# EAGLE board greenhousectrl-latest-saturday (EAGLE 7.7.0)
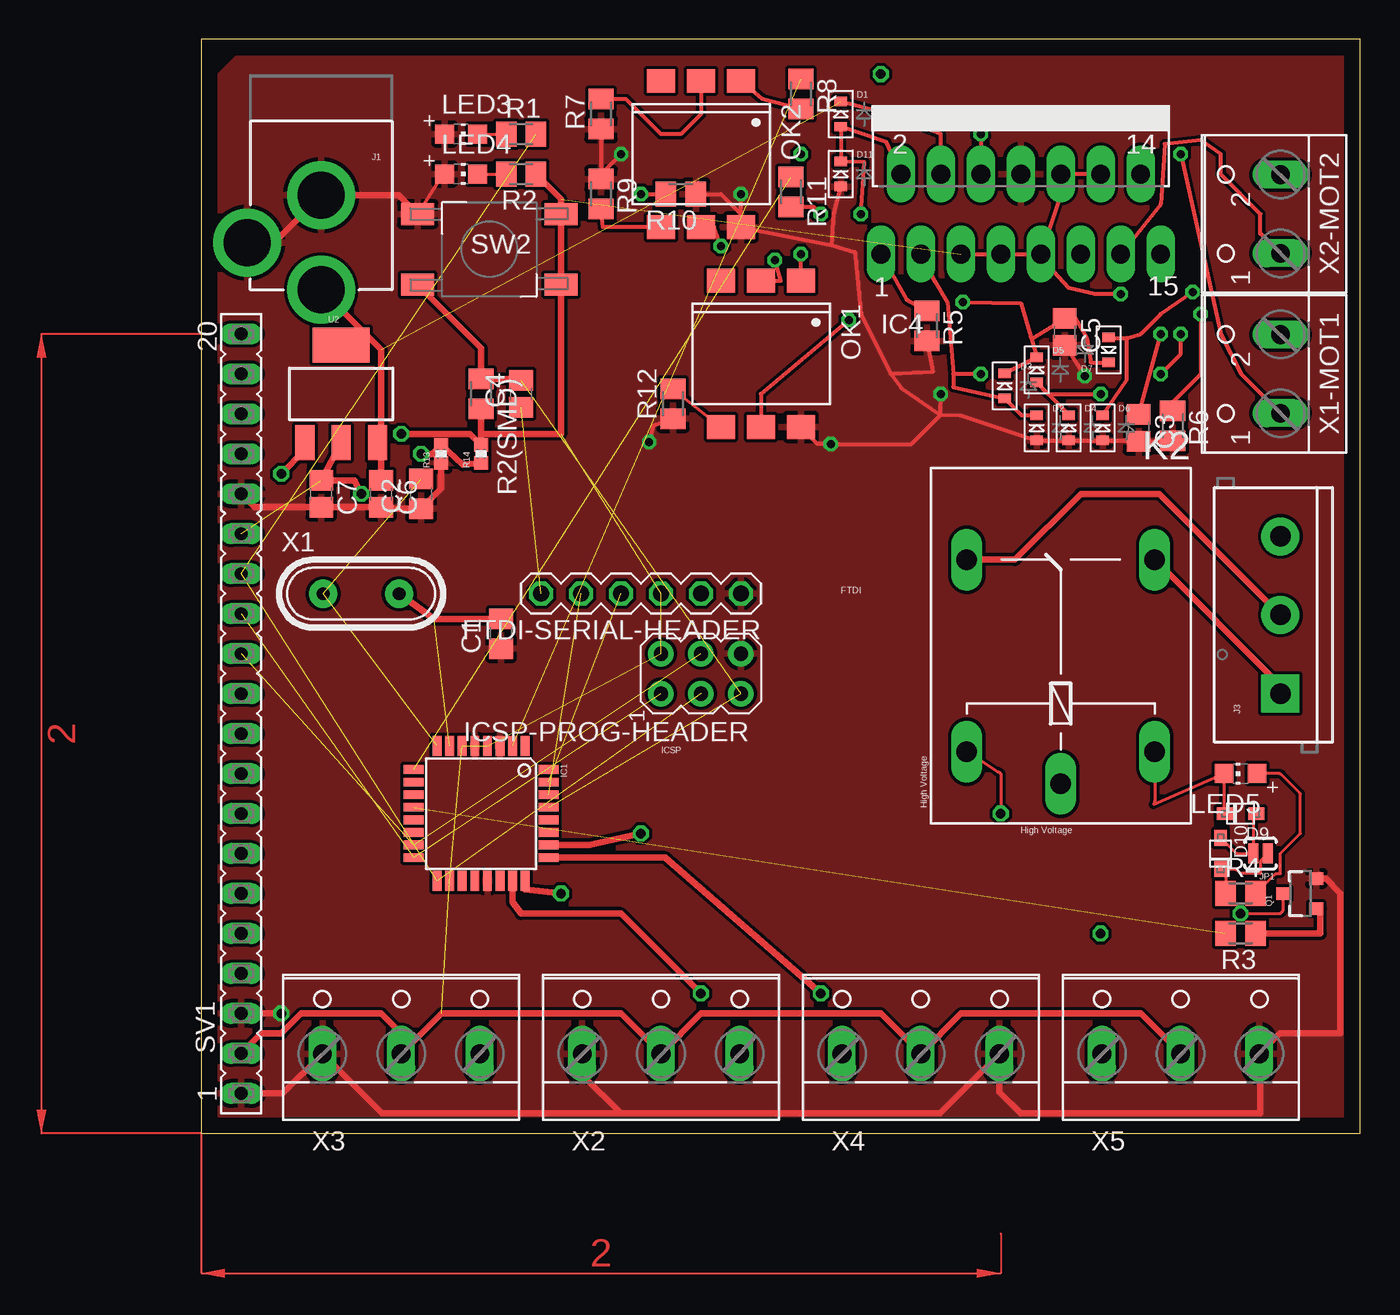
[diagram p0: board, top side]
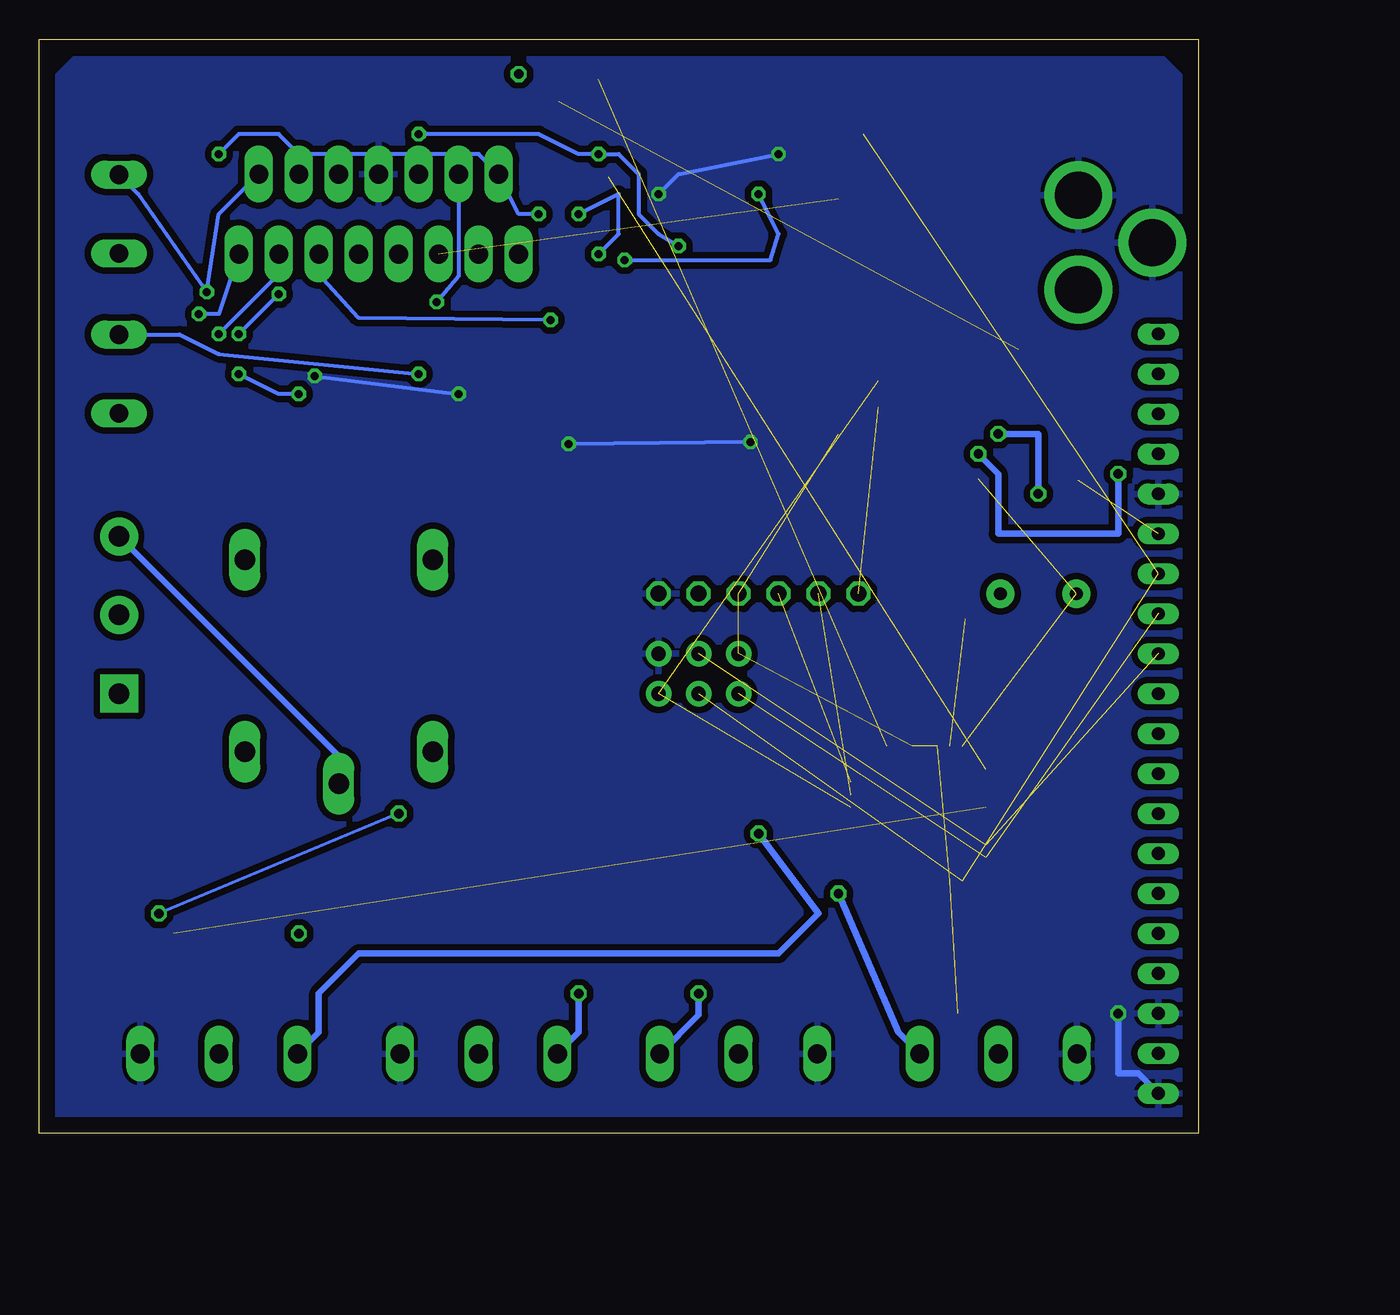
[diagram p1: board, bottom side, seen from below]

Size 73.64 x 69.52 mm. Coordinates in mm from the lower left corner, seen from the top.
Outline: 0,0 73.64,0 73.64,69.52 0,69.52 0,0
Copper layers (1*16): Top 0.035mm / dielectric 1.5mm / Bottom 0.035mm
Design rules "default": minimum track width 10mil, minimum drill 24mil, track to track 8mil, track to pad 8mil, pad to pad 8mil, via to via 8mil, smd to smd 8mil, copper to edge 40mil, drill to drill 8mil, minimum pad ring 10mil, minimum via ring 8mil, stop-mask expansion 4mil, vias tented up to drill 0mil, thermal gap 10mil

## Footprints (pad centres in the part's own frame; a part is rotated, then mirrored left to right if it is on the bottom)
C0805 = smd 1.3 x 1.5: 1 -0.95,0; 2 0.95,0
C0805' = smd 1.3 x 1.5: 1 -0.85,0; 2 0.85,0
SOD-523 = smd 0.8 x 0.6: A 0,-0.8; K 0,0.8
SOD-323F = smd 1 x 0.8: A -1,0; C 1,0
06X1-PTH = drill 1.016 octagon: 1 -6.35,0; 2 -3.81,0; 3 -1.27,0; 4 1.27,0; 5 3.81,0; 6 6.35,0
TQFP32-08 = smd 1.27 x 0.559: 1 -4.293,2.8; 2 -4.293,2; 3 -4.293,1.2; 4 -4.293,0.4; 5 -4.293,-0.4; 6 -4.293,-1.2; 7 -4.293,-2; 8 -4.293,-2.8; 17 4.293,-2.8; 18 4.293,-2; 19 4.293,-1.2; 20 4.293,-0.4; 21 4.293,0.4; 22 4.293,1.2; 23 4.293,2; 24 4.293,2.8 | smd 0.559 x 1.27: 9 -2.8,-4.293; 10 -2,-4.293; 11 -1.2,-4.293; 12 -0.4,-4.293; 13 0.4,-4.293; 14 1.2,-4.293; 15 2,-4.293; 16 2.8,-4.293; 25 2.8,4.293; 26 2,4.293; 27 1.2,4.293; 28 0.4,4.293; 29 -0.4,4.293; 30 -1.2,4.293; 31 -2,4.293; 32 -2.8,4.293
MULTIWATT-15 = drill 1.2 long: 1 -8.89,-7.62; 2 -7.62,-2.54; 3 -6.35,-7.62; 4 -5.08,-2.54; 5 -3.81,-7.62; 6 -2.54,-2.54; 7 -1.27,-7.62; 8 0,-2.54; 9 1.27,-7.62; 10 2.54,-2.54; 11 3.81,-7.62; 12 5.08,-2.54; 13 6.35,-7.62; 14 7.62,-2.54; 15 8.89,-7.62
AVRISP = drill 0.9 pad 1.626: 1 -1.27,2.54; 2 1.27,2.54; 3 -1.27,0; 4 1.27,0; 5 -1.27,-2.54; 6 1.27,-2.54
POWER_JACK_PTH = drill 2.997 pad 4.318: GND 0,7.7; GNDBREAK 4.7,10.7; PWR 0,13.7
SCREWTERMINAL-5MM-3 = drill 1.3 pad 2.413 square: 1 0,0 | drill 1.3 pad 2.413: 2 5,0; 3 10,0
PAD-JUMPER-2-NO_YES_SILK = smd 0.635 x 1.27: 1 -0.45,0; 2 0.45,0
G5LE = drill 1.321 long: 1 -7.493,-5.969; 2 -7.493,5.969; O 4.699,5.969; P -9.525,0; S 4.699,-5.969
CHIP-LED0805 = smd 1.2 x 1.2: A 0,-1.05; C 0,1.05
DIL6-SMD = smd 1.78 x 1.52: 1 -2.54,-4.645; 2 0,-4.645; 3 2.54,-4.645; 4 2.54,4.645; 5 0,4.645; 6 -2.54,4.645
SOT23-3 = smd 0.8 x 0.9: 1 -0.95,-1; 2 0.95,-1; 3 0,1.1
M0805 = smd 1.3 x 1.6: 1 -0.95,0; 2 0.95,0
0402-RES = smd 0.85 x 0.9: 1 -0.58,0; 2 0.58,0
FE20 = drill 0.813 long: 1 -24.13,0; 2 -21.59,0; 3 -19.05,0; 4 -16.51,0; 5 -13.97,0; 6 -11.43,0; 7 -8.89,0; 8 -6.35,0; 9 -3.81,0; 10 -1.27,0; 11 1.27,0; 12 3.81,0; 13 6.35,0; 14 8.89,0; 15 11.43,0; 16 13.97,0; 17 16.51,0; 18 19.05,0; 19 21.59,0; 20 24.13,0
SPST_NO_SMD = smd 2.108 x 1.397: 1 0,4.496; 2 9.119,4.496; 3 0,0; 4 9.119,0
SOT223 = smd 1.219 x 2.235: 1 -2.311,-3.099; 2 0,-3.099; 3 2.311,-3.099 | smd 3.6 x 2.2: 4 0,3.099
HC49 = drill 0.813 pad 1.8: 1 -2.413,0; 2 2.413,0
W237-102 = drill 1.194 long: 1 -2.5,-1.27; 2 2.5,-1.27
W237-103 = drill 1.194 long: 1 -5,-1.29; 2 0,-1.29; 3 5,-1.29

## Placement (x,y rotation side)
C1  [C0805]  19.05,31.75 90 top
C2  [C0805]  13.97,40.64 90 top
C3  1.0uF  [C0805']  59.56,44.83 270 top
C4  0.1uF  [C0805']  20.32,46.99 90 top
C5  1.0uF  [C0805']  54.86,50.93 270 top
C6  0.1uF  [C0805']  11.43,40.64 270 top
C7  0.1uF  [C0805']  7.62,40.64 270 top
D1  [SOD-523]  40.64,64.77 0 top
D2  [SOD-523]  53.09,44.83 0 top
D3  [SOD-523]  51.05,47.5 0 top
D4  [SOD-523]  55.12,44.83 0 top
D5  [SOD-523]  53.09,48.51 0 top
D6  [SOD-523]  57.28,44.83 0 top
D7  [SOD-523]  57.66,49.78 180 top
D9  1N4148  [SOD-323F]  66.04,20.32 180 top
D10  Zener  [SOD-323F]  64.77,17.78 270 top
D11  [SOD-523]  40.64,60.96 0 top
FTDI-SERIAL-HEADER  HEADER-06X1-MALE  [06X1-PTH]  27.94,34.29 180 top
IC1  ATMEGA168TQFP-08  [TQFP32-08]  17.78,20.32 270 top
IC4  L298  [MULTIWATT-15]  52.07,63.5 0 top
ICSP-PROG-HEADER  AVRISP-6  [AVRISP]  31.75,29.21 90 top
J1  POWER_JACKPTH  [POWER_JACK_PTH]  7.62,67.31 180 top
J3  [SCREWTERMINAL-5MM-3]  68.58,27.94 90 top
JP1  JUMPER-PAD-2-NOYES_SILK  [PAD-JUMPER-2-NO_YES_SILK]  67.31,17.78 180 top
K2  G5LE  [G5LE]  54.61,31.75 90 top
LED3  [CHIP-LED0805]  16.51,63.5 270 top
LED4  [CHIP-LED0805]  16.51,60.96 270 top
LED5  [CHIP-LED0805]  66.04,22.86 90 top
OK1  4N27SM  [DIL6-SMD]  35.56,49.53 180 top
OK2  4N27SM  [DIL6-SMD]  31.75,62.23 180 top
Q1  MMBT2222A  [SOT23-3]  69.85,15.24 90 top
R1  [M0805]  20.32,63.5 0 top
R2  [M0805]  20.32,60.96 180 top
R2(SMD)  [M0805]  17.78,46.99 270 top
R3  1K  [M0805]  66.04,12.7 180 top
R4  1K  [M0805]  66.04,15.24 0 top
R5  [M0805]  46.1,51.31 270 top
R6  [M0805]  61.72,44.96 270 top
R7  [M0805]  25.4,64.77 90 top
R8  [M0805]  38.1,66.04 270 top
R9  [M0805]  25.4,59.69 270 top
R10  [M0805]  30.48,59.69 180 top
R11  [M0805]  37.47,59.82 270 top
R12  [M0805]  29.97,46.35 90 top
R13  [0402-RES]  15.24,43.18 90 top
R14  [0402-RES]  17.78,43.18 90 top
SV1  [FE20]  2.54,26.67 90 top
SW2  MOMENTARYBUTTON  [SPST_NO_SMD]  22.86,58.42 180 top
U2  V_REG_317SMD  [SOT223]  8.89,46.99 0 top
X1  CRYSTALS-NOGND-HC49  [HC49]  10.16,34.29 0 top
X1-MOT1  [W237-102]  67.31,48.26 90 top
X2  [W237-103]  29.21,6.35 0 top
X2-MOT2  [W237-102]  67.31,58.42 90 top
X3  [W237-103]  12.7,6.35 0 top
X4  [W237-103]  45.72,6.35 0 top
X5  [W237-103]  62.23,6.35 0 top

## Library data of the parts
C1 C2 = resistor
C3-C7 D1-D7 D10 D11 ICSP-PROG-HEADER LED3-LED5 R1 R2 R2(SMD) R3-R12 = adafruit
D9 = adafruit; PROD_ID: DIO-08378
FTDI-SERIAL-HEADER = GeekAmmo; OTHER: 4UCON 00834; URL: http://www.4uconnector.com/online/SearchPro.asp?FormName=ProSearch&FormAction=search&s_GroupNo=&s_keyword=00834
IC1 = atmega328p
IC4 = st-microelectronics; MPN: L298N; OC_FARNELL: 1589425; OC_NEWARK: 32M1527
J1 = SparkFun-Connectors; PROD_ID: CONN-08197
J3 = SparkFun-Connectors; PROD_ID: CONN-10134; STOREFRONT_ID: PRT-08433
JP1 = SparkFun-Passives
K2 = relay; OC_FARNELL: unknown; OC_NEWARK: unknown
OK1 OK2 = optocoupler; MF: FAIRCHILD SEMICONDUCTOR; MPN: 4N27S-M; OC_FARNELL: unknown; OC_NEWARK: 05C3300
Q1 = SparkFun-DiscreteSemi; PROD_ID: TRANS-08049
R13 R14 = SparkFun-Resistors
SV1 = con-lsta; OC_FARNELL: unknown; OC_NEWARK: unknown
SW2 = ece388
U2 = SparkFun-PowerIC
X1 = IQD-Frequency-Products
X1-MOT1 X2-MOT2 = con-wago-500; MPN: 237-102; OC_FARNELL: unknown; OC_NEWARK: 70K9898
X2-X5 = ece388; MPN: 237-103; OC_FARNELL: unknown; OC_NEWARK: 18M7116

## Nets
+5V: C3.1 C7.1 FTDI-SERIAL-HEADER.3 IC1.4 IC1.6 IC1.18 IC4.5 IC4.7 IC4.9 IC4.10 IC4.12 ICSP-PROG-HEADER.2 R2(SMD).2 R2.1 R14.2 SV1.2 SV1.15 U2.2 X2.2 X3.2 X4.2 X5.2
+12V: C5.1 C6.1 D1.K D3.K D5.K D7.K IC4.4 J1.PWR U2.3
ADC4: SV1.4
ADC5: SV1.5
COIL: D10.C JP1.1 K2.2 Q1.3 R4.1
COMMON: J3.3 K2.P
CTS(DOESNTEXIST): FTDI-SERIAL-HEADER.2
DIODENODE: D9.A D10.A JP1.2
DTR: C4.1 FTDI-SERIAL-HEADER.6
ENA: IC4.6 OK2.5
ENB: IC4.11 OK1.5
GND: C1.1 C2.1 C3.2 C5.2 C6.2 C7.2 D2.A D4.A D6.A D11.A FTDI-SERIAL-HEADER.1 IC1.3 IC1.5 IC1.21 IC4.8 ICSP-PROG-HEADER.6 J1.GND J1.GNDBREAK LED3.A LED4.A OK1.6 OK2.6 Q1.2 R5.2 R6.2 R7.1 R9.1 R10.1 R12.1 R13.1 SV1.1 SV1.3 SV1.16 SW2.4 X2.1 X3.1 X4.3 X5.3
MISO: IC1.16 ICSP-PROG-HEADER.1 SV1.13
MOSI: IC1.15 ICSP-PROG-HEADER.4 SV1.12
N$1: OK2.1 R8.2
N$2: LED4.C R2.2
N$3: LED5.A R4.2
N$4: OK2.2 R7.2
N$5: OK2.4 R9.2
N$6: Q1.1 R3.1
N$7: R13.2 R14.1 U2.1
N$8: OK1.1 R11.2
N$9: OK1.2 R10.2
N$10: LED3.C R1.1
N$11: C1.2 IC1.7 X1.2
N$13: C2.2 IC1.8 X1.1
N$15: OK1.4 R12.2
NC: J3.1 K2.S
NO: J3.2 K2.O
OUT1: D1.A D11.K IC4.2 X1-MOT1.1
OUT2: D2.K D3.A IC4.3 X1-MOT1.2
OUT3: D4.K D5.A IC4.13 X2-MOT2.1
OUT4: D6.K D7.A IC4.14 X2-MOT2.2
PB0: IC1.12 R3.2
PB1: IC1.13
PB2: IC1.14
PC0: IC1.23 X2.3
PC1: IC1.24 X3.3
PC2: IC1.25 X4.1
PC3: IC1.26 X5.1
PC4: IC1.27
PC5: IC1.28
PD2: IC1.32
PD3: IC1.1
PD4: IC1.2 R8.1
PD5: IC1.9 R11.1
PD6: IC1.10
PD7: IC1.11
RST: C4.2 IC1.29 ICSP-PROG-HEADER.5 R2(SMD).1 SW2.2
RX: FTDI-SERIAL-HEADER.5 IC1.30
SCK: IC1.17 ICSP-PROG-HEADER.3 R1.2 SV1.14
SEN_A: IC4.1 R5.1
SEN_B: IC4.15 R6.1
SS: SV1.11
TX: FTDI-SERIAL-HEADER.4 IC1.31
VCC: D9.C K2.1 LED5.C

## Tracks (layer width: path | path; a pad name or v marks a point on that pad's centre or on a via)
+5V  (via drill 0.51, 0.6)  (8 unrouted)
  Top 0.254: C3.1 v60.96,50.8 | v58.42,53.34 56.77,53.34 55.12,53.72 53.85,55.12 IC4.9 | IC4.9 54.61,59.69 IC4.10 IC4.12 | IC4.9 IC4.7 IC4.5
  Top 0.406: SV1.2 3.81,6.35 5.08,6.35 6.35,7.62 11.43,7.62 12.7,6.35 X3.2 15.26,7.62 26.67,7.62 29.21,5.08 X2.2 31.77,7.62 43.18,7.62 45.72,5.08 X4.2 48.28,7.62 59.69,7.62 62.23,5.08 X5.2 | U2.2 C7.1 9.74,41.49 v10.16,40.64 | R2(SMD).2 17.78,44.45 | 17.78,44.45 R14.2 17.09,44.45 v12.7,44.45 | R2.1 22.86,59.37 22.86,44.45 17.78,44.45
  Bottom 0.254: v60.96,50.8 v58.42,53.34
  Bottom 0.406: v12.7,44.45 10.16,44.45 v10.16,40.64
+12V  (via drill 0.51)  (1 unrouted)
  Top 0.254: IC4.4 46.99,63.5 43.65,64.77 D1.K | v48.39,52.83 52.07,52.74 52.7,50.61 | 52.7,50.61 D5.K D3.K | D7.K 56.52,48.98 56.26,50.55 55.54,51.82 C5.1 52.81,50.51 52.7,50.61
  Top 0.406: U2.3 11.43,43.66 | 11.43,43.66 11.43,43.18 C6.1 | J1.PWR 11.43,49.8 11.43,43.66
  Bottom 0.254: IC4.4 46.99,54.48 v48.39,52.83
COIL  (via drill 0.6)
  Top 0.203: K2.2 50.57,22.99 arc-45 50.75,22.91 50.8,22.86 v50.8,20.32 | v66.04,13.97 66.04,14.19 | 66.04,14.19 arc45 65.97,14.36 R4.1 65.09,16.36 arc45 65.02,16.53 D10.C 65.67,16.78 arc-45 65.84,16.71 66.04,16.51 67.31,16.51 67.31,17.23 arc-45 67.38,17.4 JP1.1 | 66.04,14.19 66.18,14.04 arc45 66.36,13.97 68.58,13.97 68.68,14.07 arc45 68.75,14.24 Q1.3
  Bottom 0.203: v50.8,20.32 v66.04,13.97
COMMON
  Bottom 0.406: J3.3 54.61,23.97 K2.P
DIODENODE
  Top 0.203: D9.A 66.93,20.21 arc45 66.86,20.04 JP1.2 65.88,17.78 arc-45 65.7,17.85 D10.A
DTR  (1 unrouted)
ENA  (via drill 0.51)
  Top 0.254: v49.53,63.5 IC4.6 | v33.02,56.39 32.59,57.59 OK2.5
  Bottom 0.254: v49.53,63.5 41.91,63.5 39.37,62.23 v38.1,62.23 36.83,62.23 35.56,60.96 35.56,58.42 34.29,57.15 v33.02,56.39
ENB  (via drill 0.51)
  Top 0.254: v41.15,51.69 35.56,46.99 OK1.5
  Bottom 0.254: v41.15,51.69 53.34,51.82 55.88,54.61 IC4.11
GND  (via drill 0.51, 0.6)
  Top 0.203: LED4.A 15.09,60.59 arc45 15.01,60.41 SW2.4
  Top 0.254: R7.1 25.4,60.96 | 25.4,60.96 R9.1 | 43.81,48.25 41.91,52.07 41.53,56.01 40.08,56.44 | 43.81,48.25 44.49,47.37 46.93,45.68 | 46.93,45.68 46.99,45.67 | 46.99,45.67 48.23,45.63 D2.A D4.A D6.A 59.51,44.03 C3.2 61.7,43.98 R6.2 | 40.08,56.44 OK2.6 34.29,58.42 | 40.08,56.44 40.2,58.45 D11.A | 34.29,58.42 v34.29,59.69 | v26.67,62.23 25.4,60.96 | C5.2 55.24,49.53 v56.13,48.13 | R5.2 46.48,48.38 43.81,48.25 | v46.99,46.99 46.97,46.99 46.93,45.68 | R12.1 28.7,44.96 v28.45,43.94 | OK1.6 39.17,43.81 v40.01,43.81 45.13,43.81 46.99,45.67 | R10.1 33.02,59.69 34.29,58.42
  Top 0.406: 71.09,16.43 Q1.2 71.44,16.19 72.39,15.24 72.39,6.35 68.52,6.35 X5.3 67.31,4.98 67.31,1.27 52.07,1.27 50.72,2.62 X4.3 46.93,1.27 26.67,1.27 | 26.67,1.27 24.21,3.73 X2.1 | 26.67,1.27 11.49,1.27 X3.1 5.18,2.54 SV1.1 | v5.08,7.62 SV1.3 | SV1.16 3.39,39.79 C7.2 C6.2 11.53,39.69 C2.1 15.24,40.96 R13.1 | SW2.4 12.55,59.61 J1.GND 4.62,56.61 J1.GNDBREAK
  Bottom 0.254: v34.29,59.69 33.02,60.96 v26.67,62.23 | v56.13,48.13 v46.99,46.99 | v28.45,43.94 v40.01,43.81
  Bottom 0.406: SV1.1 3.81,3.81 5.08,3.81 v5.08,7.62
  pour Bottom (isolate 0.406): 0,0 0,66.04 2.54,68.58 71.12,68.58 73.66,66.04 73.66,0
  pour Top: 0,0 73.66,0 73.66,67.31 72.39,68.58 2.54,68.58 0,66.04
MISO  (2 unrouted)
MOSI  (2 unrouted)
N$1
  Top 0.254: R8.2 35.67,65.72 OK2.1
N$2
  Top 0.203: LED4.C R2.2
N$3
  Top 0.203: R4.2 68.19,16.44 arc-45 68.36,16.51 68.58,16.51 68.58,17.78 69.85,19.05 69.85,21.59 68.65,22.79 arc45 68.47,22.86 LED5.A
N$4
  Top 0.254: OK2.2 31.75,64.77 30.48,63.5 29.21,63.5 26.99,65.72 R7.2
N$5
  Top 0.254: OK2.4 25.52,57.59 R9.2
N$6
  Top 0.406: R3.1 71.12,12.7 71.12,14.29 Q1.1
N$7  (via drill 0.6)
  Top 0.406: R14.1 16.62,42.49 R13.2 14.66,43.18 v13.97,43.18 | v5.08,41.91 6.58,43.41 U2.1
  Bottom 0.406: v13.97,43.18 12.7,41.91 12.7,38.1 5.08,38.1 v5.08,41.91
N$8  (via drill 0.51)
  Top 0.254: OK1.1 v38.1,55.88 | v39.37,58.42 38.92,58.87 R11.2
  Bottom 0.254: v38.1,55.88 36.83,57.15 36.83,59.69 v39.37,58.42
N$9  (via drill 0.51)
  Top 0.203: R10.2 29.28,59.44 arc45 29.21,59.27
  Top 0.254: OK1.2 36.83,54.17 v36.45,55.5 | v27.94,59.69 R10.2
  Bottom 0.254: v36.45,55.5 27.18,55.5 26.67,57.15 v27.94,59.69
N$10
  Top 0.203: LED3.C R1.1
N$11  (1 unrouted)
  Top 0.406: X1.2 14.79,32.7 C1.2
N$13  (2 unrouted)
N$14  (via drill 0.6)
  other vias: 57.15,12.7
N$15
  Top 0.203: OK1.4 R12.2
N$16  (via drill 0.6)
  other vias: 43.18,67.31
NC
  Top 0.406: K2.S 68.58,28.45 J3.1
NO
  Top 0.406: J3.2 60.88,40.64 55.88,40.64 51.69,36.45 K2.O
OUT1  (via drill 0.51)
  Top 0.254: IC4.2 43.52,62.99 D1.A D11.K 42.13,61.72 v41.91,58.42 | v62.23,62.23 64.77,50.8 66.08,48.26 X1-MOT1.1
  Bottom 0.254: v41.91,58.42 43.18,58.42 IC4.2 45.72,62.23 57.15,62.23 58.42,63.5 60.96,63.5 v62.23,62.23
OUT2  (via drill 0.51)
  Top 0.254: IC4.3 46.61,54.14 47.41,52.83 47.79,48.26 | D2.K 52.12,45.63 D3.A 47.79,47.42 47.79,48.26 | v49.53,48.26 47.79,48.26
  Bottom 0.254: X1-MOT1.2 64.73,50.76 62.23,49.53 v49.53,48.26
OUT3  (via drill 0.51)
  Top 0.254: D4.K 55.12,45.68 D5.A 53.81,46.99 v57.15,46.99 | X2-MOT2.1 67.35,57.15 67.31,57.15 67.31,58.42 64.77,60.96 64.77,62.23 63.5,63.12 61.21,62.87 60.96,59.05 IC4.13 | v60.96,48.26 62.23,49.53 v62.23,50.8
  Bottom 0.254: v57.15,46.99 58.42,46.99 v60.96,48.26 | v62.23,50.8 58.42,54.61 IC4.13
OUT4  (via drill 0.51)
  Top 0.254: v62.99,53.47 60.96,52.07 59.69,50.8 58.8,50.55 | D6.K 58.8,47.88 58.8,50.55 | D7.A 57.7,50.55 58.8,50.55
  Bottom 0.254: 69.89,61 X2-MOT2.2 67.35,59.69 v62.99,53.47 62.23,58.42 IC4.14
PB0  (1 unrouted)
PC0  (via drill 0.6)
  Top 0.406: v31.75,8.89 26.67,13.97 20.32,13.97 19.78,14.7 IC1.23
  Bottom 0.406: X2.3 31.75,7.52 v31.75,8.89
PC1  (via drill 0.6)
  Top 0.406: v22.86,15.24 20.58,15.5 IC1.24
  Bottom 0.406: X3.3 19.05,6.41 v22.86,15.24
PC2  (via drill 0.6)
  Top 0.406: v39.37,8.89 29.47,17.52 IC1.25
  Bottom 0.406: X4.1 39.37,6.41 v39.37,8.89
PC3  (via drill 0.6)
  Top 0.406: v27.94,19.05 24.67,18.32 IC1.26
  Bottom 0.406: X5.1 55.88,6.41 55.88,8.89 53.34,11.43 26.67,11.43 24.13,13.97 v27.94,19.05
PD4  (1 unrouted)
PD5  (1 unrouted)
RST  (2 unrouted)
  Top 0.406: C4.2 20.22,47.94 R2(SMD).1 17.78,49.89 SW2.2
RX  (1 unrouted)
SCK  (3 unrouted)
SEN_A
  Top 0.254: R5.1 44.83,52.96 IC4.1
SEN_B  (via drill 0.51)
  Top 0.254: v63.5,52.07 63.5,48.26 61.72,46.48 R6.1
  Bottom 0.254: IC4.15 62.23,52.07 v63.5,52.07
TX  (1 unrouted)
VCC
  Top 0.203: K2.1 60.58,21.09 arc-45 60.51,20.91 LED5.C 64.99,20.44 arc45 D9.C
(copper drawn outside any net)
  shapes: Bottom area x2, Top area x2

## Text on the board
tPlace: FTDI | ICSP | High Voltage | High Voltage